# Altium PCB wifi.PcbDoc
Units mil, origin at the board's own origin, x right, y up, seen from the top; angles counter-clockwise.
Board outline 1310 x 1750 mil, 2 copper layers (Top Layer, Bottom Layer); 4 components, 4 nets, 60 pads, 0 vias.
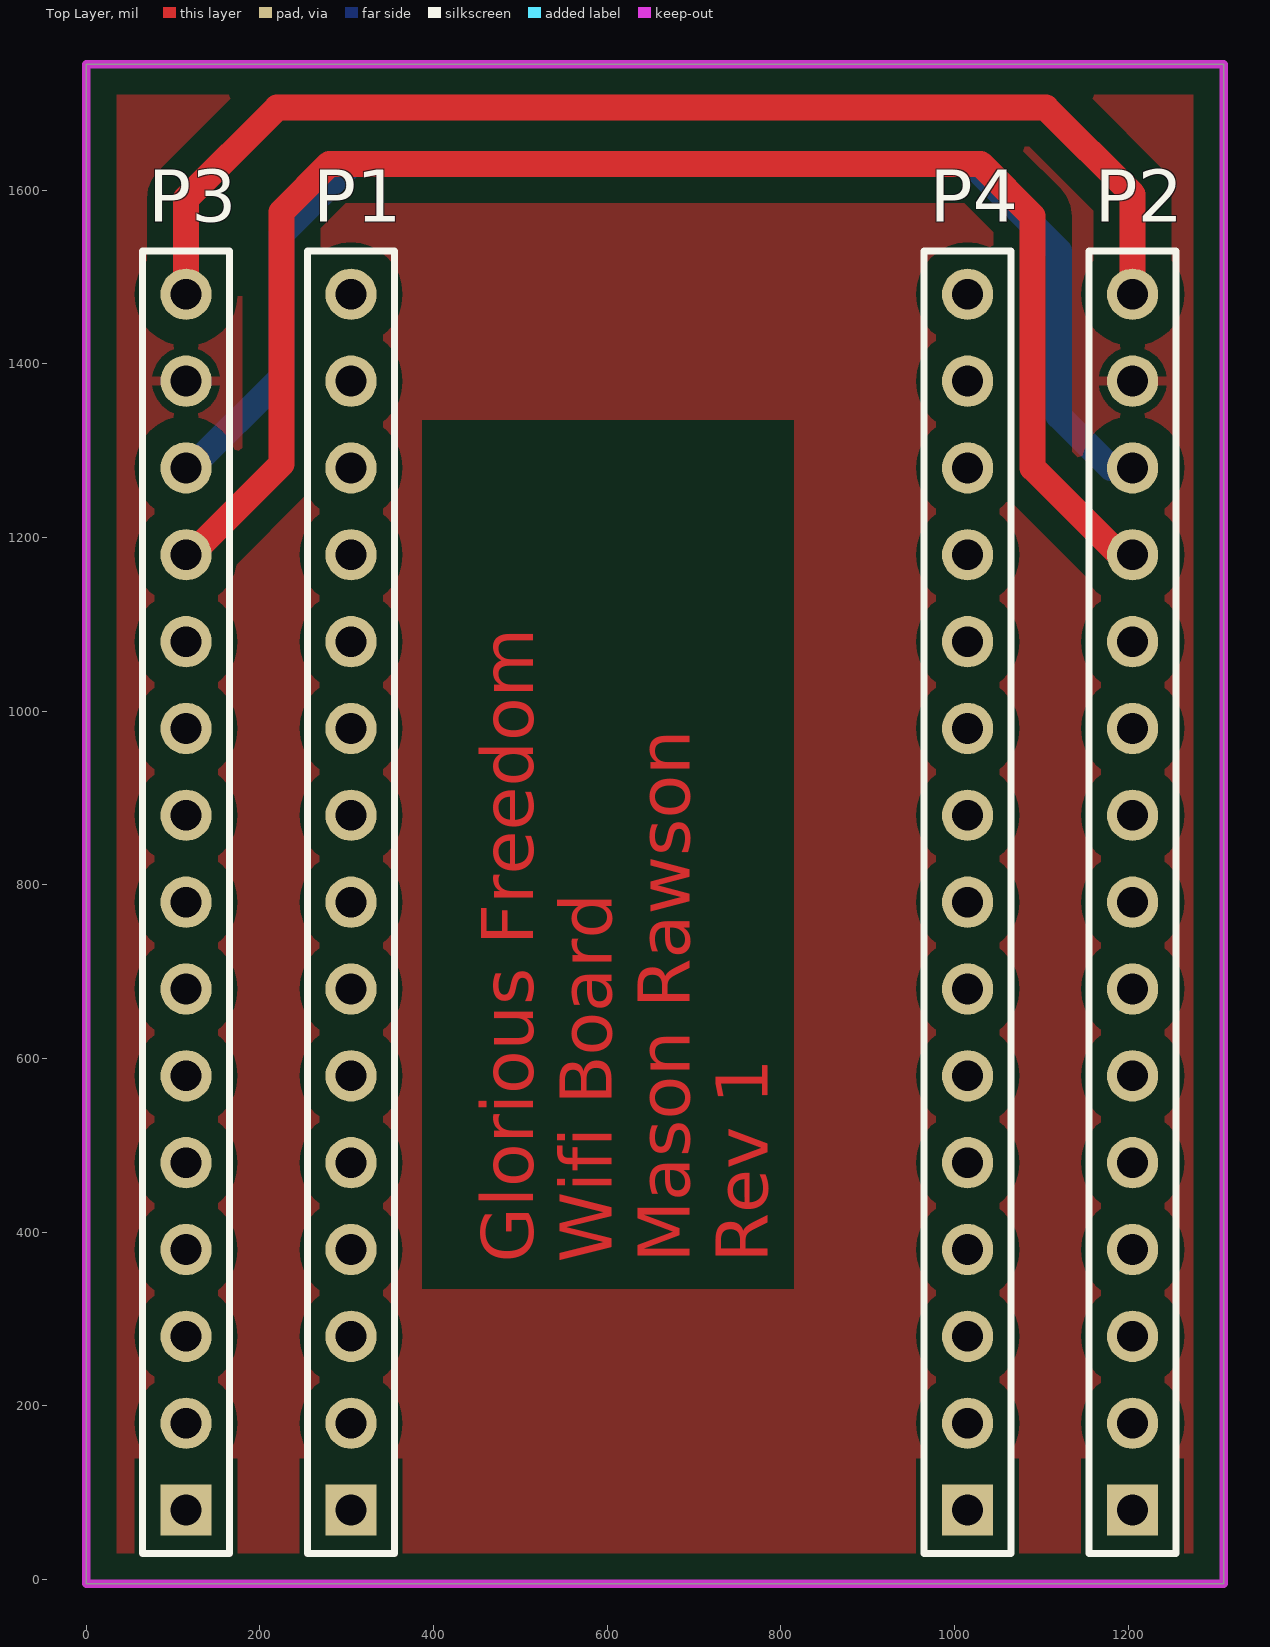
[diagram p0: Top Layer view]
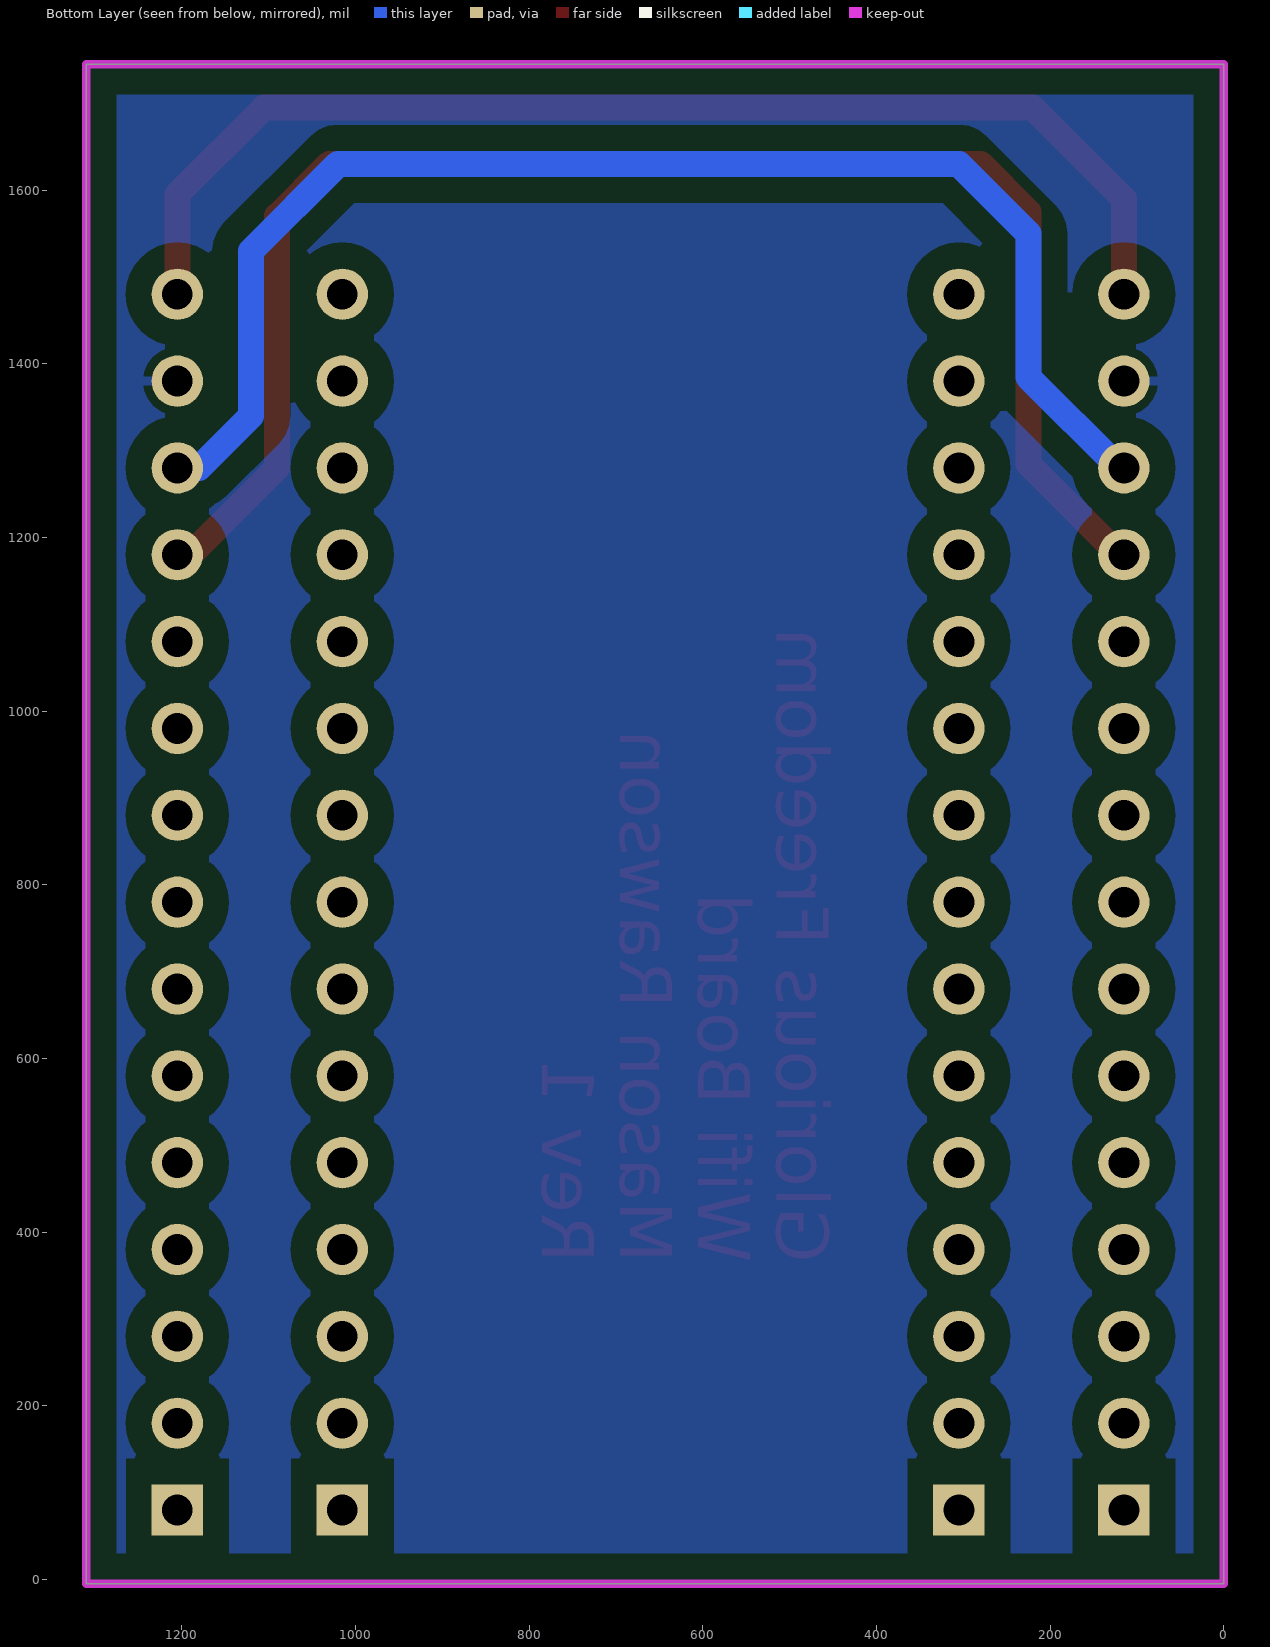
[diagram p1: Bottom Layer view, seen from below]

## Layer stack, top to bottom
Top Solder: solder mask 0.4, Solder Resist, Dk 3.5
Top Layer: signal copper 1.4
Dielectric 1: dielectric 12.6, FR-4, Dk 4.8
Bottom Layer: signal copper 1.4
Bottom Solder: solder mask 0.4, Solder Resist, Dk 3.5

## Board outline
0,-5 0,1745 1310,1745 1310,-5

## Design rules (kind name [scope] priority, off if disabled: settings)
Clearance [All] p1: gap=30
PolygonConnect [All] p1: connectstyle=Relief reliefconductorwidth=10 reliefentries=4 polygonreliefangle="90 Angle" airgapwidth=10
RoutingVias [All] p1: holewidth=28 width=50 viastyle="Through Hole" minholewidth=28 minwidth=50 maxholewidth=28 maxwidth=50
SolderMaskExpansion [All] p1: expansion=4
Width [All] p1: maxlimit=30 minlimit=30 preferedwidth=30
30 further rules are at their usual default settings.

## Components (designator, comment, footprint, x,y, rotation, side; value= is the part's Value field where it differs from the comment)
P1 "Header 15" HDR1X15 305,80 r90 top
P2 "Header 15" HDR1X15 1205,80 r90 top
P3 "Header 15" HDR1X15 115,80 r90 top
P4 "Header 15" HDR1X15 1015,80 r90 top

## Footprints (in the part's own frame and the unit in brackets; to place one, negate y for a bottom-side part, rotate by r counter-clockwise, add the part's x,y. Pads: shape width x height; smd on the part's side, far side on the other; paste and mask are expansions set on the pad)
HDR1X15 [mm] "Connector; Header; 15 Position"
  rect 1.5x1.5 hole 0.9: 1(0,0)
  round 1.5 hole 0.9: 2(2.54,0) 3(5.08,0) 4(7.62,0) 5(10.16,0) 6(12.7,0) 7(15.24,0) 8(17.78,0) 9(20.32,0) 10(22.86,0) 11(25.4,0) 12(27.94,0) 13(30.48,0) 14(33.02,0) 15(35.56,0)
  silkscreen extent -1.27,-1.27 36.83,1.27

## Part data
P1 P2 P3 P4: "Header, 15-Pin"

## Nets (pads, with @x,y where several pads share a name; then routed paths per layer and width w, separated by ;. In a path a pad name is that pad's centre, name@x,y a point inside that pad or via, vN(x,y) a via of type N, cw(c..) or ccw(c..) an arc to the next point about the centre after c; other vN are vias at no path point)
GND: P2.14 P3.14
RX: P2.12 P3.12 | length 1793.2
  Top Layer w30: P3.12 120.4,1180 225,1284.6 225,1575 280,1630 1030,1630 1090,1570 1090,1280 P2.12@1190,1180
  Bottom Layer w30: P3.12@109.6,1180 P3.12
TX: P2.13 P3.13 | length 1588.1
  Bottom Layer w30: P3.13 120.4,1280 225,1384.6 225,1550 305,1630 1020,1630 1120,1530 1120,1340 1180,1280 P2.13
VCC: P2.15 P3.15 | length 1399.9
  Top Layer w30: P3.15 115,1590 220,1695 1105,1695 1205,1595 P2.15
pads on no net: P1.1 P1.2 P1.3 P1.4 P1.5 P1.6 P1.7 P1.8 P1.9 P1.10 P1.11 P1.12 P1.13 P1.14 P1.15 P2.1 P2.2 P2.3 P2.4 P2.5 P2.6 P2.7 P2.8 P2.9 P2.10 P2.11 P3.1 P3.2 P3.3 P3.4 P3.5 P3.6 P3.7 P3.8 P3.9 P3.10 P3.11 P4.1 P4.2 P4.3 P4.4 P4.5 P4.6 P4.7 P4.8 P4.9 P4.10 P4.11 P4.12 P4.13 P4.14 P4.15

## Polygon pours and split planes (outlines as drawn)
GND on Top Layer "gnd" (solid, pour order 0): 0,-5 0,1745 1310,1745 1310,-5
GND on Bottom Layer "gnd" (solid, pour order 2): 0,-5 0,1745 1310,1745 1310,-5

## Keep-outs
Keep-Out Layer:
  the board outline again, w10

## Other copper
Top Layer:
  text "Glorious Freedom / Wifi Board / Mason Rawson / Rev 1" at 785,365 h60 r90